# Altium PCB BBB_Board.PcbDoc (part 2 of 3)
Units mil, origin at the board's own origin, x right, y up, seen from the top; angles counter-clockwise.
Board outline 11000 x 5000 mil, 2 copper layers (Top Layer, Bottom Layer); 90 components, 379 nets, 1020 pads, 470 vias.
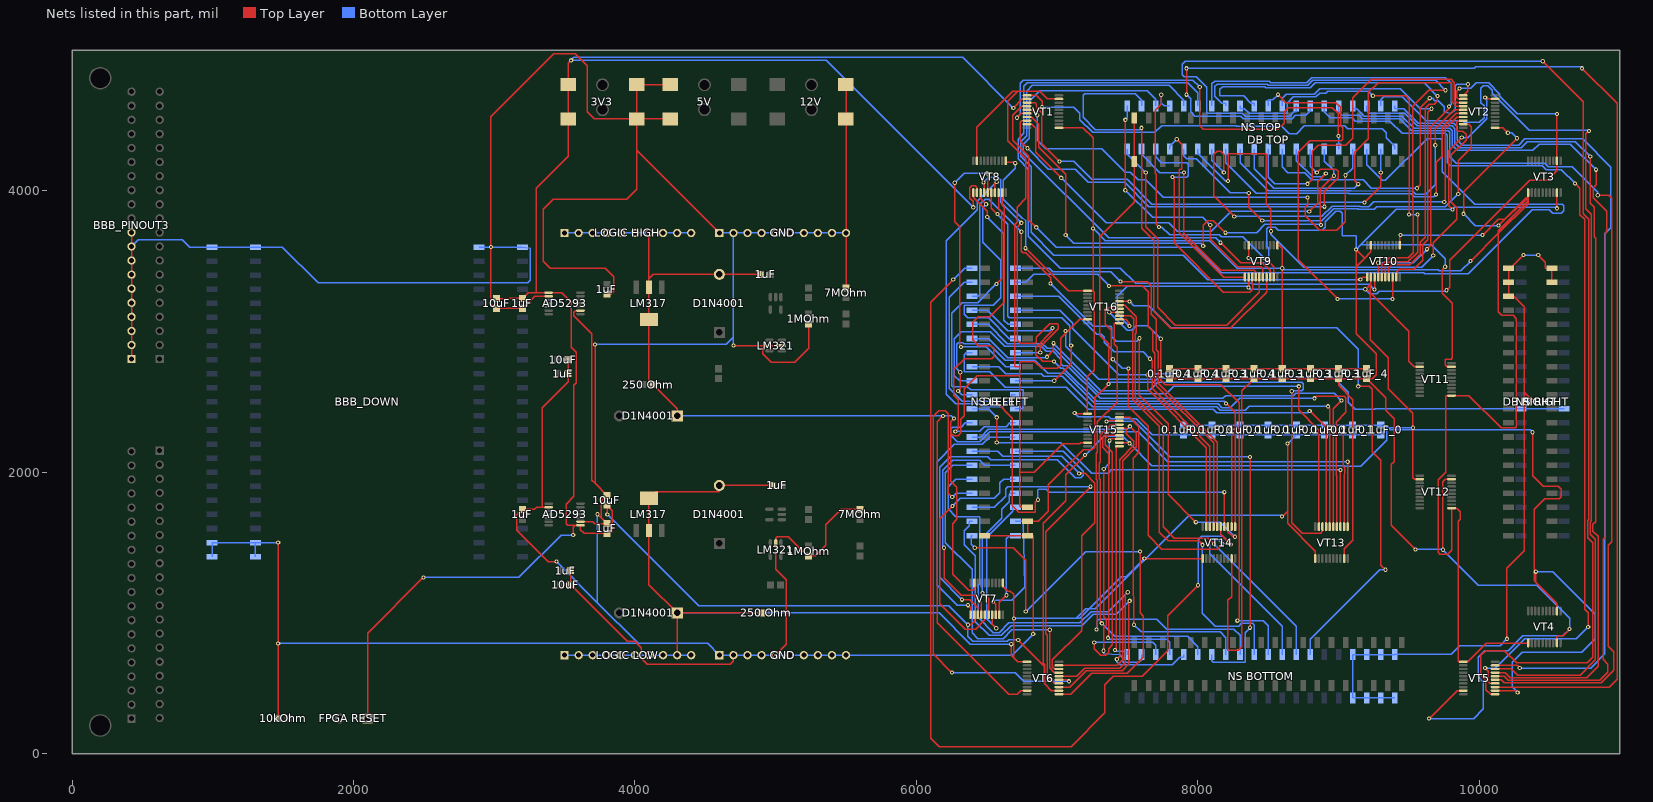
[diagram p2: the nets of this part, all layers, seen from the top]

## Via types
v1: diameter 30, hole 15, Top Layer to Bottom Layer, 470 vias

## Nets (pads, with @x,y where several pads share a name; then routed paths per layer and width w, separated by ;. In a path a pad name is that pad's centre, name@x,y a point inside that pad or via, vN(x,y) a via of type N, cw(c..) or ccw(c..) an arc to the next point about the centre after c; other vN are vias at no path point) (continued)
GLOBAL_3V3: 0.1uF_0.1 0.1uF_1.1 1uF.2@3200,3235 1uF.2@3800,1565 3V3.2 3V3.3 10uF.2@3017,3234 10uF.2@3801,1766 "FPGA RESET.1" AD5293.8 VT1.2 VT2.2 VT3.2 VT4.2 VT5.2 VT6.2 VT7.2 VT8.2 VT9.2 VT10.2 VT11.2 VT12.2 VT13.2 VT14.2 VT15.2 VT16.2 | length 37752.2
  Top Layer w10: 2100,250 2100,855 v1(2497,1252) ; 10uF.2@3017,3234 3108,3234 3109,3235 1uF.2@3200,3235 3241.77,3276.77 AD5293.8@3386.81,3276.77 3480,3276.77 3549,3207.77 3549,2887.39 3584,2852.39 3584,2637 3566,2619 3566,1827.32 3512,1773.32 3512,1632.43 3521.2,1623.23 3575.23,1623.23 ; 3300,3276.77 3300,4019 3527,4246 3V3.3@3527,4510 3V3.2@3527,4755 3527,4907 v1(3547,4927) ; v1(3561,1553) 3561,1609 3575.23,1623.23 ; 10uF.2@3801,1766 10uF.2@3804,1763 ; v1(3804,1700) 10uF.2@3804,1763 ; v1(6366,916) 6388,916 6410.43,938.43 VT7.2@6410.43,986.81 ; v1(6404,3882) 6404,3925.25 6380.98,3948.27 6380.98,4020 6394.98,4034 6420,4034 6430.43,4023.57 VT8.2@6430.43,3986.81 ; v1(6688.93,4588) 6753,4652.07 VT1.2@6786.81,4652.07 ; v1(6724,807) 6910,621 6910,497.93 6911,496.93 ; VT6.2@7013.19,447.93 6960,447.93 6911,496.93 ; v1(7199,2122) 7060,1983 7060,1798 6900,1638 6900,644 6911,633 6911,496.93 ; VT15.2@7443.19,2210.43 7509.57,2210.43 v1(7515,2205) ; VT16.2@7443.19,3085.43 7488.57,3085.43 7514,3060 v1(7514,3038) ; v1(8231,2305) 8239.57,2296.43 VT14.2@8239.57,1613.19 ; v1(8360.43,3312) VT9.2@8360.43,3386.81 ; v1(9034,2314) 9034,2042.16 9045,2031.16 9045,1991.43 9039.57,1986 VT13.2@9039.57,1613.19 ; v1(9190,3300) v1@9195.3,3305.3 ; VT10.2@9230.43,3386.81 9230.43,3340.43 ; VT12.2@9576.81,1949.57 9540,1949.57 9529,1960.57 v1(9529,2316) 9529,2417.16 9353,2593.16 9353,2813.25 9225,2941.25 9225,3275.6 ; VT11.2@9576.81,2749.57 9539.43,2749.57 9499.8,2789.2 9499.8,3000.81 9225,3275.6 ; v1(9768,3293) 9789,3314 9789,3506 10358.69,4075.69 10484.4,4075.69 10552.07,4143.35 VT3.2@10552.07,4213.19 v1(10552.07,4546) ; v1(9859,4727) 9840,4708 9840,4662.07 9850,4652.07 VT2.2@9886.81,4652.07 ; VT5.2@10113.19,447.93 10260.07,447.93 v1(10273,435) ; v1(10379,2284) 10379,1974.8 10453.8,1900 10563,1900 10583,1880 10583,1827 10569,1813 10465,1813 10390,1738 10390,1231.07 10402,1219.07 ; v1(10402,1293) 10402,1219.07 ; VT4.2@10552.07,1013.19 10552.07,1069 10402,1219.07 ; 3575.23,1623.23 AD5293.8@3613.19,1623.23 3613.19,1591.81 3640,1565 1uF.2@3800,1565 3840,1575 3840,1727 10uF.2@3804,1763 ; v1@9195.3,3305.3 9225,3275.6 ; v1@9195.3,3305.3 9230.43,3340.43 ; 9225,3275.6 9225,3321.57 9230.43,3327 9230.43,3340.43
  Bottom Layer w10: v1(2497,1252) 3176,1252 3477,1553 v1(3561,1553) ; v1(3804,1700) 4452,1052 6230,1052 v1(6366,916) 6366,832.5 6401.5,797 6644.5,797 6656.5,809 6722,809 v1(6724,807) ; v1(6404,3882) 5359,4927 v1(3547,4927) 3567,4947 6329.93,4947 v1(6688.93,4588) ; v1(7199,2122) 7332,2255 7465,2255 v1(7515,2205) 7674,2046 9042,2046 9045,2043 9158,2043 9341,2226 9341,2324 ; v1(7514,3038) 7426.66,3125.34 7426.66,3248.66 7498,3320 8352.43,3320 v1(8360.43,3312) 8372.43,3300 v1(9190,3300) 9223,3267 9269.99,3267 9287.99,3285 9760,3285 v1(9768,3293) ; 0.1uF_0.1@7900,2335 0.1uF_0.1@8100,2335 0.1uF_0.1@8300,2335 ; v1(8231,2305) 8270,2305 0.1uF_0.1@8300,2335 ; v1(9034,2314) 9055,2335 ; v1(9529,2316) 9365,2316 ; v1(9859,4727) 9940,4727 9979,4766 10066.46,4766 10145,4687.46 10145,4670 10269,4546 v1(10552.07,4546) ; v1(10273,435) 10233,475 10233,649.62 10304.38,721 10728,721 10825,818 10825,989 10521,1293 v1(10402,1293) ; v1(10379,2284) 10363,2300 9365,2300 9365,2316 ; 0.1uF_0.1@8300,2335 0.1uF_0.1@8500,2335 0.1uF_0.1@8700,2335 0.1uF_0.1@8900,2335 9055,2335 ; 9055,2335 0.1uF_1.1@9100,2335 0.1uF_0.1@9300,2335 9330,2335 ; 9330,2335 9341,2324 ; 9330,2335 9365,2316 ; 9341,2324 9349,2316 9365,2316
GLOBAL_HIGH_POWER: 0.1uF_3.1 0.1uF_4.1 1uF.2@4893,3406 "250 Ohm.2"@4129,2622 "DB LEFT.23" "LOGIC HIGH.1" "LOGIC HIGH.2" "LOGIC HIGH.3" "LOGIC HIGH.4" "LOGIC HIGH.5" "LOGIC HIGH.6" "LOGIC HIGH.7" "LOGIC HIGH.8" "LOGIC HIGH.9" "LOGIC HIGH.10" D1N4001.1@4600,3405.91 D1N4001.2@4300.91,2400 LM317.2@4100,3314.17 LM317.4@4100,3085.83 VT1.19 VT2.19 VT3.19 VT4.19 VT5.19 VT6.19 VT7.19 VT8.19 VT9.19 VT10.19 VT11.19 VT12.19 VT13.19 VT14.19 VT15.19 VT16.19 | length 34069
  Top Layer w10: 4100,3700 4100,3375 ; D1N4001.2@4300.91,2400 4300.91,2450.09 4129,2622 4100,2651 LM317.4@4100,3085.83 LM317.2@4100,3314.17 4100,3375 ; 1uF.2@4893,3406 4746.09,3406 4746,3405.91 D1N4001.1@4600,3405.91 4130.91,3405.91 4100,3375 ; v1(6189,2400) 6149,2360 6149,931 6656.5,423.5 6716.5,423.5 6740.93,447.93 VT6.19@6786.81,447.93 ; v1(6267,2381) 6246,2360 6246,2277 ; VT7.19@6410.43,1213.19 6410.43,1171.43 6399,1160 6371.66,1160 6258,1273.66 6258,1634.03 6288,1664.03 6288,1892 6246,1934 6246,2277 ; VT8.19@6430.43,4213.19 6430.43,4452.43 6685,4707 6720,4707 ; VT1.19@7013.19,4652.07 6930,4652.07 6875.07,4707 6720,4707 ; v1(7060,3003) 7077,3003 ; VT15.19@7216.81,2210.43 7169.91,2210.43 7161.69,2202.22 7039.78,2202.22 6837.56,2000 6735,2000 ; VT16.19@7216.81,3085.43 7159.43,3085.43 7077,3003 ; 0.1uF_4.1@7800,2665 7830,2665 ; v1(7865,2700) 7830,2665 ; VT14.19@8239.57,1386.81 8239.57,1114.57 8214,1089 8214,737 8216,735 8287,735 8313,761 8313,2578 0.1uF_4.1@8400,2665 ; v1(8360.43,3521.57) VT9.19@8360.43,3613.19 ; VT13.19@9039.57,1386.81 9039.57,1455 9100,1515.43 9100,2516.35 9000,2616.35 0.1uF_3.1@9000,2665 ; VT10.19@9230.43,3613.19 9230.43,3567 9185.22,3521.78 ; v1(9547,1451) 9375,1623 9375,2056 9395,2076 9395,2380 9335,2440 9335,2530 0.1uF_4.1@9200,2665 ; v1(9643,249) 9841.93,447.93 VT5.19@9886.81,447.93 ; v1@9740,1451 v1(9742,1449) 9742,1931.57 9760,1949.57 VT12.19@9803.19,1949.57 ; v1(9758,3460) 9737,3439 9737,3272.89 9809,3200.89 9809,2810 9800,2801 9758.69,2801 9756.69,2799 9756.69,2763.87 9771,2749.57 VT11.19@9803.19,2749.57 ; v1(9809,3867.36) 9781.68,3894.68 9781.68,4283.68 v1(9876,4378) ; v1(10042,4662) 10051.93,4652.07 VT2.19@10113.19,4652.07 ; VT4.19@10552.07,786.81 10552.07,829.18 10561.69,838.8 10595.8,838.8 v1(10642,885) ; v1(10552.07,3875) VT3.19@10552.07,3986.81 ; 6246,2277 6264,2259 6296,2259 6316,2279 6316,2376 6341,2401 6341,2594 6433,2686 6735,2686 ; 6720,4707 6649,4636 6649,4355 6777,4227 6777,3945 6716,3884 6716,3775.46 6698,3757.46 6698,2750 6735,2750 ; 6735,1761 6735,1980 ; 6735,1761 6791.04,1750 6746,1750 6735,1761 ; 6735,1980 6735,2000 ; 6735,1980 6734,2000 6735,2000 ; 6735,2000 6735,2686 ; 6735,2686 6735,2750 ; 6735,2750 6735,2784 6737,2786 6841.43,2786 6890.43,2737 7002,2737 7026,2761 7026,2952 7077,3003 ; 7830,2665 0.1uF_4.1@8000,2665 0.1uF_3.1@8200,2665 0.1uF_4.1@8400,2665 ; 0.1uF_4.1@8400,2665 0.1uF_3.1@8600,2665 0.1uF_3.1@8800,2665 0.1uF_3.1@9000,2665 ; 0.1uF_3.1@9000,2665 0.1uF_4.1@9200,2665 ; 9125,3461.57 9185.22,3521.78 ; 9125,3461.57 9125,2984 9269,2840 9269,2694 9240,2665 0.1uF_4.1@9200,2665 ; 9125,3461.57 v1(9125,3582) 9185.22,3521.78
  Bottom Layer w10: 3500,3700 3600,3700 3700,3700 3800,3700 3900,3700 4000,3700 4100,3700 4200,3700 4300,3700 4400,3700 ; D1N4001.2@4300.91,2400 v1(6189,2400) 6248,2400 v1(6267,2381) ; v1(7060,3003) 7060,2895 7295,2660 7664.09,2660 7704.09,2700 v1(7865,2700) ; v1(8360.43,3521.57) 8395,3487 8492,3487 8505,3500 8505,3590 8489,3606 8489,3731 8500,3742 8550,3742 8572,3720 8886,3720 8906,3740 8906,3781 8979,3854 9012,3854 9026,3840 9026,3681 9125,3681 v1(9125,3582) 9158,3615 ; v1(9547,1451) v1@9740,1451 ; v1(9643,249) 9960,249 10029,318 10029,509 9993,545 9993,684 10040,731 10204.95,731 10309.95,836 10593,836 v1(10642,885) 10642,962.48 10407.1,1197.37 9993.63,1197.37 v1(9742,1449) ; v1(9758,3460) 9758,3517 9660,3615 9158,3615 ; v1(9876,4378) 9918,4378 10053,4513 10053,4651 v1(10042,4662) ; v1(10552.07,3875) 10544.07,3883 9818.91,3883 9818.91,3877.27 v1(9809,3867.36) 9410.36,3867.36 9158,3615
GLOBAL_LOW_POWER: 0.1uF_0.2 0.1uF_1.2 0.1uF_3.2 0.1uF_4.2 1uF.2@4976,1906 "250 Ohm.2"@4898,1000 "LOGIC LOW.1" "LOGIC LOW.2" "LOGIC LOW.3" "LOGIC LOW.4" "LOGIC LOW.5" "LOGIC LOW.6" "LOGIC LOW.7" "LOGIC LOW.8" "LOGIC LOW.9" "LOGIC LOW.10" D1N4001.1@4600,1905.91 D1N4001.2@4300.91,1000 LM317.2@4100,1585.83 LM317.4@4100,1814.17 VT1.11 VT2.11 VT3.11 VT4.11 VT5.11 VT6.11 VT7.11 VT8.11 VT9.11 VT10.11 VT11.11 VT12.11 VT13.11 VT14.11 VT15.11 VT16.11 | length 31179.9
  Top Layer w10: 4300,700 4300,849 4300.91,849.91 D1N4001.2@4300.91,1000 ; 4898,1000 D1N4001.2@4300.91,1000 ; 1uF.2@4976,1906 4787.09,1906 4787,1905.91 D1N4001.1@4600,1905.91 4600,1861 4146.83,1861 LM317.4@4100,1814.17 LM317.2@4100,1585.83 4100,1200.91 D1N4001.2@4300.91,1000 ; VT7.11@6615.16,1213.19 6615.16,1191 6650.72,1155.43 6668.78,1155.43 6693,1131.21 v1(6693,961) 6693,778 6693,679.66 ; VT8.11@6635.16,4213.19 6635.16,4203 6696,4203 v1(6703,4196) ; v1(6674,778) 6674,698.66 6693,679.66 ; v1(6776,3592) 7077.84,3290.16 VT16.11@7216.81,3290.16 7253.84,3290.16 ; VT6.11@6786.81,652.66 6720,652.66 6693,679.66 ; VT1.11@7013.19,4447.34 7184,4447.34 7256,4375.34 v1(7256,3732) 7256,3292.32 7253.84,3290.16 ; v1(7125,2420) 7129.84,2415.16 VT15.11@7216,2415.16 ; VT15.11@7216.81,2415.16 VT15.11@7216,2415.16 ; v1(7620,1386) 8034.84,1386 VT14.11@8034.84,1386.81 ; 0.1uF_4.2@7800,2735 0.1uF_4.2@8000,2735 0.1uF_3.2@8200,2735 0.1uF_4.2@8400,2735 0.1uF_3.2@8600,2735 ; VT9.11@8565.16,3613.19 8580,3613.19 8600,3593.19 v1(8600,3449) 0.1uF_3.2@8600,2735 ; v1(8599,1685) 8638,1724 ; v1(8638,2203) 8638,1724 ; VT13.11@8834.84,1386.81 8834.84,1440 8638,1636.84 8638,1724 ; 0.1uF_4.2@9200,2735 0.1uF_3.2@9000,2735 0.1uF_3.2@8800,2735 0.1uF_3.2@8600,2735 ; VT10.11@9435.16,3613.19 9435.16,3680.16 v1(9440,3685) ; v1(9889,3836) 9889,3993 v1(10269,4373) ; v1(9938,3500) 10136,3698 ; v1(10024,3685) 10136,3797 10180,3797 ; VT2.11@10113.19,4447.34 10168,4447.34 v1(10203.34,4412) ; v1(10136,3753) 10180,3797 ; VT4.11@10347.34,786.81 10347.34,784 10051.34,784 9920,652.66 VT5.11@9886.81,652.66 9850,652.66 9850,1651.98 9865,1666.98 9865,1719.84 9840,1744.84 VT12.11@9803.19,1744.84 9803,1744.84 9803,1444.47 9776.53,1418 9720,1418 9708,1430 9708,1945 9763,2000 9763,2544.84 VT11.11@9803.19,2544.84 9926.14,2544.84 10155.98,2315 10264,2315 10264,3091 10241,3114 10161,3114 10136,3139 10136,3698 ; VT3.11@10347.34,3986.81 10347.34,3950 ; VT15.11@7216,2415.16 7216,2678 7264,2726 7264,3280 7253.84,3290.16 ; 10136,3698 10136,3717 10347.34,3928.34 ; 10136,3698 10347.34,3909.34 10347.34,3928.34 ; 10180,3797 10333,3950 10347.34,3950 ; 10180,3797 10347.34,3950 ; 10347.34,3928.34 10347.34,3950
  Bottom Layer w10: 3500,700 3600,700 3700,700 3800,700 3900,700 4000,700 4100,700 4200,700 4300,700 4400,700 ; D1N4001.2@4300.91,1000 6162.65,1000 6384.65,778 v1(6674,778) ; v1(6693,961) 7136.26,961 ; v1(6703,4196) 6703,4160 6619,4076 6619,3941 6754,3806 6776,3790 v1(6776,3592) ; v1(7125,2420) 7152,2393 7368,2393 7382,2379 7562,2379 7676,2265 0.1uF_0.2@7900,2265 0.1uF_0.2@8100,2265 0.1uF_0.2@8300,2265 0.1uF_0.2@8500,2265 0.1uF_0.2@8700,2265 ; v1(7256,3732) 7342,3646 8084,3646 8281,3449 v1(8600,3449) 8612,3437 9709,3437 9716,3430 9868,3430 v1(9938,3500) ; v1(7620,1386) 7491,1257 7456,1257 7227,1028 ; v1(8599,1685) 8590,1694 7938,1694 7272,1028 7227,1028 ; v1(8638,2203) 0.1uF_0.2@8700,2265 ; 0.1uF_0.2@9300,2265 0.1uF_1.2@9100,2265 0.1uF_0.2@8900,2265 0.1uF_0.2@8700,2265 ; v1(9440,3685) v1(10024,3685) ; v1(9889,3836) 9972,3753 v1(10136,3753) ; v1(10203.34,4412) 10230,4412 v1(10269,4373) ; 7136.26,961 7160,961 7227,1028 ; 7136.26,961 7203.26,1028 7227,1028
GND: 1MOhm.1 1uF.1@3200,1735 1uF.1@3200,3165 1uF.1@3525,2700 1uF.1@3543,1300 1uF.1@3800,1635 1uF.1@3800,3265 3V3.1 5V.2 5V.3 7MOhm.1 10kOhm.1 10uF.1 12V.1 "DB LEFT.20" "DB LEFT.21" "DB LEFT.22" "DB RIGHT.19" "DB RIGHT.20" "DB RIGHT.21" "DB RIGHT.22" "DB RIGHT.23" "DB TOP.20" "DB TOP.21" "NS BOTTOM.17" "NS BOTTOM.18" "NS BOTTOM.19" "NS BOTTOM.20" "NS BOTTOM.21" "NS BOTTOM.22" "NS BOTTOM.23" "NS BOTTOM.24" "NS RIGHT.11" "NS RIGHT.30" AD5293.2 AD5293.9 BBB_DOWN.1 BBB_DOWN.2 BBB_DOWN.43 BBB_DOWN.44 BBB_DOWN.45 BBB_DOWN.46 BBB_DOWN.47 BBB_DOWN.48 BBB_PINOUT3.1 BBB_PINOUT3.2 BBB_PINOUT3.3 BBB_PINOUT3.4 BBB_PINOUT3.5 BBB_PINOUT3.6 BBB_PINOUT3.7 BBB_PINOUT3.8 BBB_PINOUT3.9 BBB_PINOUT3.10 GND.1 GND.2 GND.3 GND.4 GND.5 GND.6 GND.7 GND.8 GND.9 GND.10 LM321.2@5000,1494.29 LM321.2@5044.29,2900 | length 46862
  Top Layer w10: BBB_PINOUT3.1@423,2804 BBB_PINOUT3.2@423,2904 BBB_PINOUT3.3@423,3004 BBB_PINOUT3.4@423,3104 BBB_PINOUT3.5@423,3204 BBB_PINOUT3.6@423,3304 BBB_PINOUT3.7@423,3404 BBB_PINOUT3.8@423,3504 BBB_PINOUT3.9@423,3604 BBB_PINOUT3.10@423,3704 ; 10kOhm.1@1465,250 v1(1465,783) v1(1465,1500) ; AD5293.2@3386.81,1751.18 3341,1751.18 ; AD5293.9@3386.81,3251.18 3288.58,3251.18 3233.2,3195.81 3230.81,3195.81 1uF.1@3200,3165 3109,3165 3108,3164 10uF.1@3017,3164 2977,3194 v1(2977,3600) 2977,4527 3422,4972 3577,4972 3662,4887 3662,4560 3712,4510 3V3.1@4012,4510 ; v1(3443,1365) 3383,1365 3159,1589 3159,1698 3170,1709 3174,1709 1uF.1@3200,1735 3285,1735 3301.18,1751.18 3341,1751.18 ; 10uF.1@3525,2800 1uF.1@3525,2700 3525,2642.36 3341,2458.36 3341,1751.18 ; 1uF.1@3543,1300 10uF.1@3543,1200 3944,799 4000,799 4046,753 4046,679 4089,636 4679,636 4700,657 GND.2@4700,700 ; AD5293.9@3613.19,1648.82 3699,1648.82 3712.82,1635 1uF.1@3800,1635 3760,1675 ; AD5293.2@3613.19,3148.82 3580,3148.82 3567,3135.82 3567,3112 3695,2984 3695,1942 3717,1920 ; v1(3717,2908) 3717,1920 ; v1(3734,1701) 3760,1675 ; 1uF.1@3800,3265 3828,3265 3850,3287 3850,3390 3790,3450 3400,3450 3350,3500 3350,3870 3420,3940 3942,3940 4012,4010 4012,4288 ; 5V.3@4252,4510 3V3.1@4012,4510 ; 5V.2@4252,4755 3V3.1@4012,4755 3V3.1@4012,4510 ; GND.1@4600,3700 4012,4288 ; v1(4700,2900) 4930,2900 ; GND.5@5000,700 5076,776 5076,1235 5000,1311 LM321.2@5000,1494.29 5000,1530 5010,1540 5090,1540 5195,1435 5205,1435 1MOhm.1@5235,1405 5282,1405 5357,1480 5357,1627 5465,1735 7MOhm.1@5600,1735 ; LM321.2@5044.29,2900 4930,2900 ; 1MOhm.1@5235,3054 5235,2880 5135,2780 4970,2780 4909,2841 4909,2879 4930,2900 ; 7MOhm.1@5500,3310 GND.10@5500,3700 12V.1@5500,4770 ; 6483.96,1550 6791.04,1550 ; v1(6830,850) 6830,1550 6791.04,1550 ; 7550,4516.04 7550,4208.96 7550,3920 7304,3674 7304,2974.67 7366,2912.67 v1(7366,2626) 7268,2528 7268,2179 7247,2158 7186,2158 6939,1911 6939,1724 6865,1650 6791.04,1650 6791.04,1550 ; v1(10197,816) 10197,1317 10321,1441 10321,2568 ; v1(10314,3543) 10221,3450 10208.96,3450 10208.96,3350 10208.96,3250 10246,3250 10321,3175 10321,2568 ; v1(10375,2510) 10321,2568 ; v1(10419,3543) 10470,3492 10470,3450 10516.04,3450 10516.04,3350 ; 3717,1920 10uF.1@3801,1836 3773,1808 3770,1808 3760,1798 3760,1675 ; 4012,4288 3V3.1@4012,4510
  Bottom Layer w10: BBB_PINOUT3.9@423,3604 472,3653 782,3653 835,3600 BBB_DOWN.1@995.83,3600 BBB_DOWN.2@1302.91,3600 1495.13,3600 1748.13,3347 3237,3347 3255,3365 3255,3590 BBB_DOWN.48@3200,3600 v1(2977,3600) BBB_DOWN.47@2892.91,3600 ; BBB_DOWN.45@995.83,1400 BBB_DOWN.43@995.83,1500 BBB_DOWN.44@1302.91,1500 ; BBB_DOWN.46@1302.91,1400 BBB_DOWN.44@1302.91,1500 ; v1(1465,783) 4025,783 ; v1(1465,1500) BBB_DOWN.44@1302.91,1500 ; v1(3443,1365) 3734,1074 ; v1(3717,2908) 4648,2908 4700,2960 ; v1(3734,1701) 3734,1074 ; GND.1@4600,3700 GND.2@4700,3700 ; v1(4700,2900) 4700,2960 ; GND.10@5500,3700 GND.9@5400,3700 GND.8@5300,3700 GND.7@5200,3700 GND.6@5100,3700 GND.5@5000,3700 GND.4@4900,3700 GND.3@4800,3700 GND.2@4700,3700 ; v1(6830,850) 6680,700 GND.10@5500,700 GND.9@5400,700 GND.8@5300,700 GND.7@5200,700 GND.6@5100,700 GND.5@5000,700 GND.4@4900,700 GND.3@4800,700 GND.2@4700,700 GND.1@4600,700 4517,783 4025,783 ; v1(7366,2626) 7378.16,2638.16 7685.22,2638.16 7716.06,2669 8970,2669 9070,2569 9070,2498 9120,2448 9259,2448 9261,2450 10296.46,2450 10319,2450 ; 9400,396.46 9300,396.46 9200,396.46 9100,396.46 9100,703.54 9200,703.54 9300,703.54 9400,703.54 9400,707 9800,707 9861,768 10149,768 v1(10197,816) ; v1(10314,3543) v1(10419,3543) ; v1(10375,2510) 10340,2510 10319,2489 10319,2450 ; 10603.54,2450 10319,2450 ; 3734,1074 4025,783 ; 4700,2960 GND.2@4700,3700
IVL_B0: "NS TOP.1" VT1.1 | length 2942.5
  Top Layer w10: VT1.1@6786.81,4677.66 6851.34,4677.66 6893,4636 v1(6893,4594)
  Bottom Layer w10: v1(6893,4594) 7120,4594 7162,4552 7162,4505 7253,4414 7695,4414 7743,4462 8272.49,4462 8275.49,4459 8597,4459 8650,4406 8702,4406 8758,4462 9044.53,4462 9065.53,4441 9312,4441 9340,4413 9340,4376 9400,4316 9400,4296.46
IVL_B1: "NS TOP.2" VT1.3 | length 3273.6
  Top Layer w10: VT1.3@6786.81,4626.48 6849.52,4626.48 6857.64,4586 6890,4553.64 6890,4335 v1(7017,4208) ; v1(9185,3917) 9300,4032 v1(9300,4130)
  Bottom Layer w10: v1(7017,4208) 7117,4208 7245,4080 7497.51,4080 7672.51,3905 8858,3905 8870,3917 v1(9185,3917) ; v1(9300,4130) 9300,4296.46
IVL_B2: "NS TOP.3" VT1.4 | length 7133.1
  Top Layer w10: VT1.4@6786.81,4600.89 6749.82,4600.89 6685,4536.07 6685,4360.15 6800,4245.15 6800,3792 v1(6852,3740)
  Bottom Layer w10: v1(6852,3740) 6994.03,3597.97 7988.03,3597.97 8168,3418 9606.65,3418 9613.65,3411 9922.18,3411 10376.11,3864.93 10497.07,3864.93 10523,3839 10582,3839 10601.5,3858.5 10601.5,3893.5 10590,3905 9967,3905 9736,4136 9736,4360 9725,4371 9630,4371 9333,4074 9310,4074 9200,4184 9200,4296.46
IVL_B3: "NS TOP.4" VT1.5 | length 3384.2
  Top Layer w10: VT1.5@6786.81,4575.3 6820.7,4575.3 v1(6859,4537) ; v1(8780,3953) 8780,3901 8762,3883 8762,3823 8865,3720 8989,3720 9049,3780 v1(9049,4110)
  Bottom Layer w10: v1(6859,4537) 6859,4360 6920,4299 7318,4299 7485,4132 7521.13,4132 7575.13,4078 7629.54,4078 7754.54,3953 v1(8780,3953) ; v1(9049,4110) 9100,4161 9100,4296.46
IVL_B4: "NS TOP.5" VT1.6 | length 3299.1
  Top Layer w10: v1(6715,4519) 6745.7,4549.7 VT1.6@6786.81,4549.7 ; v1(8014,4738.21) 8014,4461 8039,4436 8569,4436 8613,4480 8613,4562 8641,4590 8957,4590 8997,4550 8997,4391.31 v1(9000,4388.31)
  Bottom Layer w10: v1(6715,4519) 6738,4542 6738,4765 6760,4787 7965.21,4787 v1(8014,4738.21) ; 9000,4296.46 v1(9000,4388.31)
IVL_B5: "NS TOP.6" VT1.7 | length 3652
  Top Layer w10: VT1.7@6786.81,4524.11 6818.89,4524.11 6870,4473 6870,4307.65 7061,4116.65 v1(7061,3685) ; v1(8038,3608) 8038,3755 8071,3788 8110,3788 v1(8196,3702) ; v1(8876,3756) 8870,3762 8870,4010 v1(8967,4107)
  Bottom Layer w10: v1(7061,3685) 7120,3626 8020,3626 v1(8038,3608) ; v1(8196,3702) 8418,3702 8477,3761 8871,3761 v1(8876,3756) ; 8900,4296.46 8900,4211 8967,4144 v1(8967,4107)
IVL_B6: "NS TOP.7" VT1.8 | length 3183.5
  Top Layer w10: VT1.8@6786.81,4498.52 6750,4498.52 6740,4488.52 6740,4352 v1(6790,4302) ; v1(8846,4129) 8869,4152 8982,4152 8997,4137 8997,4091.17 8900,3994.17 v1(8900,3887)
  Bottom Layer w10: v1(6790,4302) 6937.89,4154.11 7127.89,4154.11 7222,4060 7480.09,4060 7653.09,3887 v1(8900,3887) ; 8800,4296.46 8800,4175 v1(8846,4129)
IVL_B7: "NS TOP.8" VT1.9 | length 3147.1
  Top Layer w10: VT1.9@6786.81,4472.93 6820.38,4472.93 6849.89,4443.42 6849.89,4272.11 v1(7030,4092) ; v1(8792,3853) 8851,3912 8851,4063 v1(8910,4122)
  Bottom Layer w10: v1(7030,4092) 7350,3772 7795,3772 7855,3712 8096.73,3712 8237.73,3853 v1(8792,3853) ; 8700,4296.46 8700,4214.58 8816.58,4098 8886,4098 v1(8910,4122)
IVL_B8: "NS TOP.9" VT2.1 | length 2441.4
  Top Layer w10: v1(9558,4018) 9581,4041 9581,4591 v1(9648,4658) ; VT2.1@9886.81,4677.66 9889.09,4677.66 9920,4708.57 v1(9920,4757)
  Bottom Layer w10: 8600,4296.46 8600,4169 8640,4129 8759,4129 8811,4077 9175,4077 9234,4018 v1(9558,4018) ; v1(9648,4658) 9668,4658 9685,4641 9707.53,4641 9750,4598.53 9750,4559 9800,4549 9828,4577 9828,4745 9840,4757 v1(9920,4757)
IVL_B9: "NS TOP.10" VT2.3 | length 2338.1
  Top Layer w10: v1(8780,4049) 8814,4083 8814,4279 8857,4322 9050,4322 9101,4373 9101,4661 9231,4791 9800,4791 9822,4769 9822,4644.48 9840,4626.48 VT2.3@9886.81,4626.48
  Bottom Layer w10: 8500,4296.46 8500,4097 8548,4049 v1(8780,4049)
IVL_B10: "NS TOP.11" VT2.4 | length 2496.7
  Top Layer w10: v1(9140,4047) 9115,4072 9115,4273 9213,4371 9213,4699.32 9281.68,4768 9796,4768 9803,4761 9803,4635.07 9837.18,4600.89 VT2.4@9886.81,4600.89
  Bottom Layer w10: 8400,4296.46 8400,4157 8538,4019 9112,4019 v1(9140,4047)
IVL_B11: "NS TOP.12" VT2.5 | length 2256.6
  Top Layer w10: v1(9688,4323) 9688,4440.98 9822.31,4575.3 VT2.5@9886.81,4575.3
  Bottom Layer w10: 8300,4296.46 8300,4200 8499,4001 9090,4001 9527,3997 9549,3975 9620,3975 9688,4043 v1(9688,4323)
IVL_B12: "NS TOP.13" VT2.6 | length 2382.8
  Top Layer w10: v1(9693,3973) 9693,4201.5 9738,4246.5 9738,4450.53 9837.18,4549.7 VT2.6@9886.81,4549.7
  Bottom Layer w10: 8200,4296.46 8200,4200 8417,3983 9072,3983 9076.68,3978.32 9516.68,3978.32 9538,3957 9677,3957 v1(9693,3973)
IVL_B13: "NS TOP.14" VT2.7 | length 3147.7
  Top Layer w10: v1(8185,4130) 8185,4260 8163,4282 8137,4282 8114,4259 8114,3963 v1(8259,3818) ; v1(9751,3921) 9759,3929 9759,4444 9839.11,4524.11 VT2.7@9886.81,4524.11
  Bottom Layer w10: 8100,4296.46 8100,4215 v1(8185,4130) ; v1(8259,3818) 8881,3818 8954,3891 9151,3891 9155,3887 9215,3887 9249,3921 v1(9751,3921)
IVL_B14: "NS TOP.15" VT2.8 | length 3836.7
  Top Layer w10: v1(8215,4069) 8215,4264 8485,4264 8485,3905 8520,3870 v1(8520,3712) ; v1(9673,3539) 9673,3630 9839,3796 9839,3880 9802,3917 9802,4255 9906,4359 9906,4400 9884,4422 9851,4422 9840,4433 9840,4488.52 9850,4498.52 VT2.8@9886.81,4498.52
  Bottom Layer w10: 8000,4296.46 8000,4267.32 8198.32,4069 v1(8215,4069) ; v1(8520,3712) 8520,3690 8752,3458 9592,3458 v1(9673,3539)
IVL_B15: "NS TOP.16" VT2.9 | length 2911.1
  Top Layer w10: v1(8362,3985) 8362,3884 v1(8458,3788) ; v1(9851,3977.32) 9851,4214.18 9943,4306.18 9943,4454 9924.07,4472.93 VT2.9@9886.81,4472.93
  Bottom Layer w10: 7900,4296.46 7900,4247 7920,4227 7988.95,4227 8230.95,3985 v1(8362,3985) ; v1(8458,3788) 8880,3788 8965,3873 9136,3873 9141,3868 9253,3868 9271,3886 9759.68,3886 v1(9851,3977.32)
IVL_B16: "NS TOP.17" VT9.1 | length 1380.1
  Top Layer w10: v1(7850,4366) 7886,4330 7886,4155.58 7885,4154.58 7871,4154.58 7869,4152.58 7869,3703.32 8185.32,3387 8334.84,3387 VT9.1@8334.84,3386.81
  Bottom Layer w10: 7800,4296.46 7800,4316 v1(7850,4366)
IVL_B17: "NS TOP.18" VT9.3 | length 1781.1
  Top Layer w10: v1(7820,4097) 7831,4086 7831,3628.97 8181.97,3278 8369,3278 8391,3300 8391,3335.02 8386.02,3340 VT9.3@8386.02,3386.81
  Bottom Layer w10: 7700,4296.46 7700,4240 7742,4198 7922,4198 7931,4189 7931,4108 7920,4097 v1(7820,4097)
IVL_B18: "NS TOP.19" VT9.4 | length 1484.2
  Top Layer w10: v1(7901,4129) 7901,3697 8164,3434 8400,3434 8411.61,3422.39 VT9.4@8411.61,3386.81
  Bottom Layer w10: 7600,4296.46 7600,4259 7730,4129 v1(7901,4129)
IVL_B19: "NS TOP.20" VT9.5 | length 2193.3
  Top Layer w10: v1(7630,4129) 7630,3743.76 7714,3659.76 7714,3173 7841,3046 8206,3046 8437.2,3277.2 VT9.5@8437.2,3386.81
  Bottom Layer w10: 7500,4296.46 7500,4259 v1(7630,4129)
IVL_B20: "NS TOP.21" VT9.6 | length 1932.2
  Top Layer w10: v1(7485,4003.61) v1(7485,4504) ; v1(8088.33,3756) 8088.33,3656.67 8283.43,3461.57 8447.04,3461.57 8462.8,3445.81 VT9.6@8462.8,3386.81
  Bottom Layer w10: v1(7485,4003.61) 7678.61,3810 8034.33,3810 v1(8088.33,3756) ; v1(7485,4504) 7500,4519 7500,4603.54
IVL_B21: "NS TOP.22" VT9.7 | length 3495.8
  Top Layer w10: v1(7600,4447) 7600,3735 7688,3647 7688,3142.1 7806.17,3023.93 8232.31,3023.93 8488.39,3280 VT9.7@8488.39,3386.81
  Bottom Layer w10: v1(7600,4447) 7588,4435 7271.72,4435 7185,4521.72 7185,4679 7196,4690 7554,4690 7600,4644 7600,4603.54
IVL_B22: "NS TOP.23" VT9.8 | length 3532.6
  Top Layer w10: v1(8162,3631) 8304,3489 8459,3489 8513.98,3434.02 VT9.8@8513.98,3386.81
  Bottom Layer w10: 7700,4603.54 7700,4652 7640,4712 6878,4712 6801,4635 6801,4373 6760,4332 6760,4271.76 7366.76,3665 8128,3665 v1(8162,3631)
IVL_B23: "NS TOP.24" VT9.9 | length 2099.5
  Top Layer w10: v1(7725,3742) 7705,3762 7705,4117.42 7697.31,4125.1 7697.31,4573.31 7740,4616 v1(7740,4682) ; v1(8475,3518) 8480,3518 8539.57,3458.43 VT9.9@8539.57,3386.81
  Bottom Layer w10: v1(7725,3742) 7745,3742 7800,3687 8150.94,3687 8166.02,3671.92 8321.08,3671.92 v1(8475,3518) ; v1(7740,4682) 7740,4623.54 7760,4603.54 7800,4603.54
IVL_B24: "NS TOP.25" VT10.1 | length 4804
  Top Layer w10: v1(9155,3369) 9172.81,3386.81 VT10.1@9204.84,3386.81
  Bottom Layer w10: 7900,4603.54 7900,4644 7796,4748 6825,4748 6783,4706 6783,4391 6742,4350 6742,4244 6815,4171 6815,3704 6976.08,3542.92 7897.08,3542.92 8072,3368 9154,3368 v1(9155,3369)
IVL_B25: "NS TOP.26" VT10.3 | length 5184.6
  Top Layer w10: v1(9255,3298.02) 9256.02,3299.05 VT10.3@9256.02,3386.81
  Bottom Layer w10: 8000,4603.54 8000,4695.43 7929.43,4766 6786.71,4766 6763,4742.29 6763,4407 6723,4367 6723,4227 6796,4154 6796,3678 7023,3451 7449.92,3451 7558.92,3342 8382,3342 8390,3334 9219.02,3334 v1(9255,3298.02)
IVL_B26: "NS TOP.27" VT10.4 | length 3638.1
  Top Layer w10: VT10.4@9281.61,3386.81 v1(9281.61,3488.61) ; v1(9629,3585) 9655,3611 9655,4454 9786,4585 v1(9786,4599)
  Bottom Layer w10: 8100,4603.54 8100,4759 8120,4779 8508,4779 8520,4767 8773.7,4767 8809.7,4803 9760,4803 9800,4763 9800,4613 v1(9786,4599) ; v1(9281.61,3488.61) 9532.61,3488.61 v1(9629,3585)
IVL_B27: "NS TOP.28" VT10.5 | length 3549.9
  Top Layer w10: VT10.5@9307.2,3386.81 9307.2,3470.84 9360,3523.63 9494.25,3523.63 9530,3559.39 9530,3861.09 9526,3865.09 9526,4599 9641.36,4714.36 v1(9760,4714.36)
  Bottom Layer w10: 8200,4603.54 8200,4623 8169.69,4623 8120,4672.69 8120,4741 8137,4758 8493,4758 8502,4749 8781.16,4749 8817.16,4785 9689.36,4785 v1(9760,4714.36)
IVL_B28: "NS TOP.29" VT10.6 | length 2867.3
  Top Layer w10: v1(9244,4675) 9476,4675 9504,4647 9504,3835 v1(9500,3831) ; VT10.6@9332.8,3386.81 9332.8,3466.63 9360.17,3494 9492,3494 9562,3564 v1(9562,3831)
  Bottom Layer w10: 8300,4603.54 8300,4584 8329,4584 8363.83,4549.17 8634.69,4549.17 8634.69,4622.69 8679,4667 8838,4667 8865,4694 8909,4694 8922,4707 9212,4707 v1(9244,4675) ; v1(9500,3831) v1(9562,3831)
IVL_B29: "NS TOP.30" VT10.7 | length 3463.5
  Top Layer w10: VT10.7@9358.39,3386.81 9358.39,3454.22 9379.17,3475 9505.71,3475 9580.78,3550.07 9580.78,3633 9616,3668.22 9616,4585 9645,4614 9681,4614 9702.47,4635.47 v1(9702.47,4673.25)
  Bottom Layer w10: 8400,4603.54 8400,4623 8378,4623 8325.08,4675.92 8160,4675.92 8156,4679.92 8156,4720 8176,4740 8475,4740 8484,4731 8799.61,4731 8835.61,4767 9608.72,4767 v1(9702.47,4673.25)
IVL_B30: "NS TOP.31" VT10.8 | length 2904.7
  Top Layer w10: v1(8570,4683) 8626,4627 8981,4627 9015.31,4592.69 9015.31,4461.67 9031,4445.99 9031,4366 9020,4355 8795,4355 8714,4274 8714,3510 v1(8993,3231) ; v1(9383.98,3231) VT10.8@9383.98,3386.81
  Bottom Layer w10: 8500,4603.54 8500,4647 8534,4647 v1(8570,4683) ; v1(8993,3231) v1(9383.98,3231)
IVL_B31: "NS TOP.32" VT10.9 | length 2564.4
  Top Layer w10: VT10.9@9409.57,3386.81 9409.57,3420 9432.35,3442.78 9535.78,3442.78 9598.78,3505.78 9598.78,3615 9635.72,3651.95 9635.72,4557.72 v1(9661,4583)
  Bottom Layer w10: 8600,4603.54 8600,4659 8628,4687 8829.15,4687 8868.15,4726 9438,4726 9581,4583 v1(9661,4583)
IVL_B32: "NS TOP.33" VT5.1 | length 9325.3
  Top Layer w10: VT5.1@10113.19,422.34 10080,422.34 10047,455.34 10047,523 10011,559 10011,698 10045,732 10179,732 10265,646 10767,646 10806,685 10806,1499 10771,1534 10771,1656 10779,1664 10779,3797 10740,3836 10740,4631 v1(10451,4920)
  Bottom Layer w10: 8700,4603.54 8700,4566 8695.69,4561.69 8683.2,4561.69 8652.69,4531.17 8335.4,4531.17 8317.57,4549 8065,4549 8065,4734 7990.49,4808.51 7904.49,4808.51 7889,4824 7889,4899 7910,4920 v1(10451,4920)
IVL_B33: "NS TOP.34" VT5.3 | length 9400.2
  Top Layer w10: v1(7920,4683) v1(7920,4870) ; VT5.3@10113.19,473.52 10923.52,473.52 10979,529 10979,4621 v1(10730,4870)
  Bottom Layer w10: v1(7920,4683) 7950,4653 7950,4560 7980,4530 8306.17,4530 8323,4513.17 8670.69,4513.17 8693.56,4536.05 8767.05,4536.05 8800,4569 8800,4603.54 ; v1(7920,4870) 9964.26,4870 9973.7,4879.44 10720.56,4879.44 v1(10730,4870)
IVL_B34: "NS TOP.35" VT5.4 | length 6351.7
  Top Layer w10: v1(10042,608) 10065,585 10065,510 10075.89,499.11 VT5.4@10113.19,499.11 ; v1(10681,4052) 10715,4018 10715,3830 10749,3796 10749,1025 10774,1000 v1(10774,900)
  Bottom Layer w10: 8900,4603.54 8900,4560 8942,4518 9097,4518 9120,4495 9365.46,4495 9453.46,4407 9760,4407 9772,4395 9772,4202 9795,4179 10447.11,4179 10475.11,4151 10582,4151 v1(10681,4052) ; v1(10042,608) 10113,608 10322,817 10691,817 v1(10774,900)
IVL_B35: "NS TOP.36" VT5.5 | length 6622.4
  Top Layer w10: VT5.5@10113.19,524.7 10155.5,524.7 10177.2,503 10866,503 10955,592 10955,724 10917,762 10917,1481 10942,1506 10942,3672.87 10943,3673.87 10943,3945 10920,3968 v1(10842,3968)
  Bottom Layer w10: 9000,4603.54 9000,4560 9023,4537 9146.31,4537 9170.31,4513 9433.64,4513 9521.64,4425 9780,4425 9790,4415 9790,4242 9835,4197 10467.11,4197 10492.11,4172 10659.54,4172 10842,3989.54 v1(10842,3968)
IVL_B36: "NS TOP.37" VT5.6 | length 6504.7
  Top Layer w10: VT5.6@10113.19,550.3 10178,550.3 10207.3,521 10855,521 10914,580 10914,636 10881,669 10881,1525.25 10895,1539.25 10895,3697.37 10907,3709.37 10907,3855 10811,3951 10811,4022 10830,4041 v1(10830,4150)
  Bottom Layer w10: 9100,4603.54 9100,4584 9130.17,4584 9183.17,4531 9449.09,4531 9537.09,4443 9792,4443 9809,4426 9809,4323 9843,4289 10381.66,4289 10424.66,4332 10648,4332 v1(10830,4150)
IVL_B37: "NS TOP.38" VT5.7 | length 6295.9
  Top Layer w10: VT5.7@10113.19,575.89 10184.11,575.89 10221,539 10763.11,539 10844,619.89 10844,1543.5 10808,1579.5 10808,1629 10827,1648 10827,3661.42 10816.56,3671.87 10816.56,3882.44 10789,3910 v1(10789,4244.22)
  Bottom Layer w10: 9200,4603.54 9200,4567.05 9218.05,4549 9470.4,4549 9558.4,4461 9807,4461 9827,4441 9827,4341 9861,4307 10299,4307 10342,4350 10683.22,4350 v1(10789,4244.22)
IVL_B38: "NS TOP.39" VT5.8 | length 6592.1
  Top Layer w10: VT5.8@10113.19,601.48 10229,601.48 10272,558.48 10717.48,558.48 10825,666 10825,1524 10789,1560 10789,1646 10797,1654 10797,3833 10758,3872 10758,4404 v1(10779,4425)
  Bottom Layer w10: 9300,4603.54 9300,4647 9320,4667 9452,4667 9622,4497 9882,4497 9893,4486 10000,4486 10034,4520 10034,4603 10011,4626 10011,4729 10029,4747 10060,4747 10092.35,4714.65 10092.35,4691.29 10354.64,4429 10775,4429 v1(10779,4425)
IVL_B39: "NS TOP.40" VT5.9 | length 6123.7
  Top Layer w10: VT5.9@10113.19,627.07 10268.93,627.07 v1(10288,608)
  Bottom Layer w10: 9400,4603.54 9400,4584 9463,4584 9568,4479 9820,4479 9845,4454 9845,4361 9881,4325 10281,4325 10324,4368 10736,4368 10936,4168 10936,3738.87 10893,3695.87 10893,710 10791,608 v1(10288,608)
IVL_B40: "NS LEFT.1" VT6.1 | length 3327.6
  Top Layer w10: v1(6415,1463) 6690,1463 6777,1376 v1(6777,1010) ; VT6.1@7013.19,422.34 7098.34,422.34 7247,571 7498.53,571 7613,685.47 7613,977 7590,1000 v1(7590,1436)
  Bottom Layer w10: 6396.46,1550 6389,1550 6389,1489 v1(6415,1463) ; v1(6777,1010) 7203,1436 v1(7590,1436)
IVL_B41: "NS LEFT.2" VT6.3 | length 3033
  Top Layer w10: VT6.3@7013.19,473.52 7089.8,473.52 7205.73,589.46 7462.93,589.46 7510.5,637.04 7510.5,1080.5 v1(7516,1086)
  Bottom Layer w10: 6396.46,1650 6377,1650 6377,1620 6342,1585 6342,1485 6419,1408 6419,939 6518,840 6603,840 6673,910 7176,910 7258,992 7422,992 v1(7516,1086)
IVL_B42: "NS LEFT.3" VT6.4 | length 2524
  Top Layer w10: VT6.4@7013.19,499.11 6978.89,499.11 6929,549 6929,840 6918,851 6918,1577.31 v1(7238,1897.31)
  Bottom Layer w10: 6396.46,1750 6555,1750 6634.93,1829.93 6634.93,1882.25 6649.69,1897 6859.69,1897 6860.69,1898 7237.31,1898 v1(7238,1897.31)
IVL_B43: "NS LEFT.4" VT6.5 | length 3698.1
  Top Layer w10: v1(6253,576) 6120,709 6120,2397 6160,2437 6207,2437 6227,2417 6227,1851 v1(6255,1823) ; VT6.5@7013.19,524.7 7073.3,524.7 v1(7084,514)
  Bottom Layer w10: v1(6253,576) 6701,576 6763,514 v1(7084,514) ; v1(6255,1823) 6282,1850 6396.46,1850
IVL_B44: "NS LEFT.5" VT6.6 | length 3564
  Top Layer w10: VT6.6@7013.19,550.3 7139.26,550.3 7196.97,608 7445.5,608 7484,646.5 7484,1129 v1(7502,1147)
  Bottom Layer w10: 6396.46,1950 6280,1950 6225,1895 6225,1741 6281,1685 6451,1685 6451,1207 6439,1195 6439,969 6548,860 6589,860 6658,929 7161,929 7242,1010 7365,1010 v1(7502,1147)
IVL_B45: "NS LEFT.6" VT6.7 | length 2373.2
  Top Layer w10: v1(6948,880) 6948,609 6981.11,575.89 VT6.7@7013.19,575.89
  Bottom Layer w10: 6396.46,2050 6260,2050 6207,1997 6207,1499 6396,1310 6396,858 6436.43,817.57 6616.57,817.57 6679,880 v1(6948,880)
IVL_B46: "NS LEFT.7" VT6.8 | length 2449.7
  Top Layer w10: VT6.8@7013.19,601.48 6981.52,601.48 6966,617 6966,665.7 7174.51,874.21 7174.51,1547.51 7268,1641 7268,1922 7198.49,1991.51 v1(7157,1991.51)
  Bottom Layer w10: 6396.46,2150 6579,2150 6615,2114 7034.51,2114 v1(7157,1991.51)
IVL_B47: "NS LEFT.8" VT6.9 | length 3339.9
  Top Layer w10: VT6.9@7013.19,627.07 7426.57,627.07 7465,665.5 7465,2082 7563,2180 7563,2280 v1(7517,2326)
  Bottom Layer w10: 6396.46,2250 6456,2250 6512,2306 7497,2306 v1(7517,2326)
IVL_B48: "NS LEFT.9" VT13.1 | length 3631.4
  Top Layer w10: VT13.1@9065.16,1613.19 v1(9065.16,2074)
  Bottom Layer w10: 6396.46,2350 6348,2350 6318,2320 6257,2320 6246,2309 6246,2261 6291.69,2215.31 6449.81,2215.31 6520.5,2286 7576,2286 7788,2074 v1(9065.16,2074)
IVL_B49: "NS LEFT.10" VT13.3 | length 3323.7
  Top Layer w10: v1(6571,2211) v1(6571,2390) ; VT13.3@9013.98,1613.19 v1(9014,2016)
  Bottom Layer w10: 6396.46,2450 6455.15,2446 6515,2446 v1(6571,2390) ; v1(6571,2211) 7025.24,2211 7244.61,1991.63 7362,1991.63 7386.37,2016 v1(9014,2016)
IVL_B50: "NS LEFT.11" VT13.4 | length 4402.8
  Top Layer w10: v1(6297,2577) 6312,2592 v1(6312,2710) ; v1(8830,2525) 8844,2539 9042,2539 9052,2529 9052,2425 8983,2356 8983,1979.39 8988.39,1974 VT13.4@8988.39,1613.19
  Bottom Layer w10: v1(6297,2577) 6324,2550 6396.46,2550 ; v1(6312,2710) 6288,2734 6288,2910 6298,2920 6332,2920 6338,2914 6514,2914 6632,2796 6841,2796 6935,2702 7054,2702 7271,2485 8145,2485 8171,2459 8231,2459 8297,2525 v1(8830,2525)
IVL_B51: "NS LEFT.12" VT13.5 | length 4347.8
  Top Layer w10: VT13.5@8962.8,1613.19 8962.8,2450.8 v1(9021,2509)
  Bottom Layer w10: 6396.46,2650 6306.83,2650 6270,2686.83 6270,2949 6320,2999 6525,2999 6628,2896 6886.84,2896 6924.42,2858.42 6971.58,2858.42 7026,2804 7026,2770.76 7038.76,2758 7072,2758 7305,2525 8179,2525 8198,2544 8680,2544 8697,2561 8969,2561 v1(9021,2509)
IVL_B52: "NS LEFT.13" VT13.6 | length 3527.6
  Top Layer w10: v1(8925,2468) 8937.2,2455.8 VT13.6@8937.2,1613.19
  Bottom Layer w10: 6396.46,2750 6584,2750 6634,2700 6889,2700 6906,2683 7036.33,2683 7253.33,2466 8134,2466 8159,2441 8337,2441 8364,2468 v1(8925,2468)
IVL_B53: "NS LEFT.14" VT13.7 | length 3630.7
  Top Layer w10: v1(8795,2435) 8911.61,2318.39 VT13.7@8911.61,1613.19
  Bottom Layer w10: 6396.46,2850 6356,2850 6342,2836 6342,2715 6522,2714 6633,2603 7065,2603 7220,2448 8110,2448 8136,2422 8782,2422 v1(8795,2435)
IVL_B54: "NS LEFT.15" VT13.8 | length 3997.6
  Top Layer w10: v1(6929,2820) 6974,2865 v1(6974,2917) ; v1(8668,2575) 8668,1640 8742,1566 8872.02,1566 8886.02,1580 VT13.8@8886.02,1613.19
  Bottom Layer w10: 6396.46,2950 6514.49,2950 6649.49,2815 6924,2815 v1(6929,2820) ; v1(6974,2917) 7311,2580 7655,2580 7715,2640 8738,2640 8748,2630 8748,2590 8737,2579 8672,2579 v1(8668,2575)
IVL_B55: "NS LEFT.16" VT13.9 | length 3603.2
  Top Layer w10: v1(8718,2610) 8718,2442 8860.43,2299.57 VT13.9@8860.43,1613.19
  Bottom Layer w10: 6396.46,3050 6511,3050 6647,2914 6896.34,2914 6929.05,2881.28 6976.72,2881.28 7300.6,2557.4 7776.4,2557.4 7829,2610 v1(8718,2610)
IVL_B56: "NS LEFT.17" VT14.1 | length 3274.2
  Top Layer w10: v1(6967,3024) 6967,3004 6849,2886 6849,2836.17 6898.17,2787 v1(6978,2787) ; v1(8201,2489) 8265.16,2424.84 VT14.1@8265.16,1613.19
  Bottom Layer w10: 6396.46,3150 6503,3150 6649,3004 6947,3004 v1(6967,3024) ; v1(6978,2787) 7025.18,2739.82 7045.18,2739.82 7282,2503 8187,2503 v1(8201,2489)
IVL_B57: "NS LEFT.18" VT14.3 | length 4313.4
  Top Layer w10: v1(6746,3709) 6746,3570 6756,3560 6777.38,3560 6954,3383.38 v1(6954,3340) ; v1(7585,2952) 7585,2547.11 7789,2343.11 7789,1842 v1(7986,1645) ; VT14.3@8213.98,1613.19 8213.98,1578.02 8251,1541 v1(8264,1541)
  Bottom Layer w10: 6396.46,3250 6440,3250 6452,3262 6452,3903 6489,3940 6515,3940 v1(6746,3709) ; v1(6954,3340) 7258,3036 7380,3036 7390,3026 7390,2964 7421.93,2932.07 7565.07,2932.07 v1(7585,2952) ; v1(7986,1645) 8160,1645 v1(8264,1541)
IVL_B58: "NS LEFT.19" VT14.4 | length 3948.1
  Top Layer w10: v1(6563,2505) 6683,2385 6683,1760 6729,1714 6846,1714 6846,1786 v1(6864,1804) ; VT14.4@8188.39,1613.19 v1(8188.39,1858)
  Bottom Layer w10: 6396.46,3350 6339,3350 6233,3244 6233,2598 6326,2505 v1(6563,2505) ; v1(6864,1804) 6864,1876 6868,1880 6922,1880 6944,1858 v1(8188.39,1858)
IVL_B59: "NS LEFT.20" VT14.5 | length 6904.1
  Top Layer w10: v1(6262,3369) 6101,3208 6101,109 6161,49 7099,49 7340,290 7340,491 7399,550 7604,550 7785,731 7785,980 v1(8002,1197) ; VT14.5@8162.8,1613.19 8162.8,1558.2 v1(8234,1487)
  Bottom Layer w10: v1(6262,3369) 6343,3450 6396.46,3450 ; v1(8002,1197) 8002,1519 8028,1545 8176,1545 v1(8234,1487)
IVL_B60: "NS LEFT.21" VT14.6 | length 2923.6
  Top Layer w10: v1(7451,3355) 7640,3355 7669,3326 7669,3123 7705,3087 7705,2868.92 7719,2854.92 7719,2632 8137.2,2213.8 VT14.6@8137.2,1613.19
  Bottom Layer w10: 6703.54,3450 6944,3450 6969,3425 7381,3425 v1(7451,3355)
IVL_B61: "NS LEFT.22" VT14.7 | length 2879.9
  Top Layer w10: v1(7369.48,3324) 7606,3324 7649,3281 7649,3034 7679,3004 7679,2862.82 7695.04,2846.77 7695.04,2624.97 8111.61,2208.4 VT14.7@8111.61,1613.19
  Bottom Layer w10: 6703.54,3350 6777,3350 6833,3406 7287.48,3406 v1(7369.48,3324)
IVL_B62: "NS LEFT.23" VT14.8 | length 2530.1
  Top Layer w10: v1(7660,2806) 7675,2791 7675,2596.79 8086.02,2185.76 VT14.8@8086.02,1613.19
  Bottom Layer w10: 6703.54,3250 7011,3250 7280.52,2980.48 7315.39,2980.48 7335.87,2960 7335.87,2925.13 7406,2855 7611,2855 v1(7660,2806)
IVL_B63: "NS LEFT.24" VT14.9 | length 2404.2
  Top Layer w10: v1(7644.09,2690.91) 7644.09,2591.7 8060.43,2175.35 VT14.9@8060.43,1613.19
  Bottom Layer w10: 6703.54,3150 7018.86,3150 7110.99,3057.86 7110.99,3018.06 7438.14,2690.91 v1(7644.09,2690.91)
IVL_B64: "NS LEFT.25" VT8.1 | length 1090.7
  Top Layer w10: VT8.1@6404.84,3986.81 6404.84,3952.16 6504,3853 v1(6504,3813)
  Bottom Layer w10: v1(6504,3813) 6622,3695 6622,3080 6652,3050 6703.54,3050
IVL_B65: "NS LEFT.26" VT8.3 | length 1604.9
  Top Layer w10: VT8.3@6456.02,3986.81 6456.02,3944 v1(6496.02,3904)
  Bottom Layer w10: v1(6496.02,3904) 6471,3878.98 6471,3634 6599,3506 6599,3239 6545,3185 6342,3185 6341,3184 6341,3121 6366,3096 6514,3096 6660,2950 6703.54,2950
IVL_B66: "NS LEFT.27" VT8.4 | length 2244.2
  Top Layer w10: v1(6477,4059) 6481.61,4054.39 VT8.4@6481.61,3986.81 ; v1(6746,3772) 6716,3742 6716,2939 6740,2915 6845.42,2915 6852,2921.58 6852,2958 6948,3054 7003,3054 7009,3048 7009,3020 6880,2891 v1(6880,2850)
  Bottom Layer w10: v1(6477,4059) 6515,4097 6580,4097 6601,4076 6601,3917 v1(6746,3772) ; 6703.54,2850 v1(6880,2850)
IVL_B67: "NS LEFT.28" VT8.5 | length 2024.5
  Top Layer w10: v1(6272.96,4057) 6272.96,3780.27 6310,3743.23 6310,2898 v1(6318,2890) ; v1(6501,4123.8) 6507.2,4117.59 VT8.5@6507.2,3986.81
  Bottom Layer w10: v1(6272.96,4057) 6339.75,4123.8 v1(6501,4123.8) ; v1(6318,2890) 6495,2890 6635,2750 6703.54,2750
IVL_B68: "NS LEFT.29" VT8.6 | length 2116.7
  Top Layer w10: VT8.6@6532.8,3986.81 6532.8,3877.2 v1(6576,3834) ; v1(6980,2650) 7100,2770 v1(7100,2899.88)
  Bottom Layer w10: v1(6576,3834) 6648,3762 6648,3109.31 6660,3097.31 7033.49,3097.31 7090.94,3039.86 7090.94,2908.94 v1(7100,2899.88) ; 6703.54,2650 v1(6980,2650)
IVL_B69: "NS LEFT.30" VT8.7 | length 2318.9
  Top Layer w10: VT8.7@6558.39,3986.81 6558.39,4050.39 v1(6571,4063)
  Bottom Layer w10: v1(6571,4063) 6434,3926 6434,3866 6211,3643 6211,2555.26 6280.26,2486 6450,2486 6472,2464 6615,2464 6676,2525 6676,2550 6703.54,2550
IVL_B70: "NS LEFT.31" VT8.8 | length 2294.7
  Top Layer w10: v1(6569,3338) 6606,3375 6606,3850 6583.98,3872.02 VT8.8@6583.98,3986.81
  Bottom Layer w10: v1(6569,3338) 6435,3204 6325,3204 6251,3130 6251,2616 6260,2607 6362.53,2607 6384.84,2584.69 6758,2584.69 6758,2460 6748,2450 6703.54,2450
IVL_B71: "NS LEFT.32" VT8.9 | length 2660.2
  Top Layer w10: v1(6277,2290) 6298,2311 6298,2516.37 6266,2548.37 6266,2730.43 6342.57,2807 6536,2807 6549,2820 6549,2880 6529,2900 6440,2900 6400,2940 6400,3065 6440,3105 6520,3105 6624,3209 6624,3882 6609.57,3896.43 VT8.9@6609.57,3986.81
  Bottom Layer w10: v1(6277,2290) 6449,2290 6483,2324 6637.95,2324 6663.95,2350 6703.54,2350
IVL_B72: "NS LEFT.33" VT7.1 | length 1858.8
  Top Layer w10: v1(6366,1055) 6384.84,1036.16 VT7.1@6384.84,986.81
  Bottom Layer w10: v1(6366,1055) 6290,1055 6148,1197 6148,2075 6270,2197 6468.69,2197 6521.69,2250 6703.54,2250
IVL_B73: "NS LEFT.34" VT7.3 | length 2886.4
  Top Layer w10: v1(6323.79,1094) 6380,1094 6436.02,1037.98 VT7.3@6436.02,986.81
  Bottom Layer w10: v1(6323.79,1094) 6166,1251.79 6166,2036 6240,2110 6507.5,2110 6528.5,2089 6999.51,2089 7127.51,1961 7169.49,1961 7187,1978.51 7187,2008.09 7045.09,2150 6703.54,2150
IVL_B74: "NS LEFT.35" VT7.4 | length 1753.6
  Top Layer w10: v1(6197,1463) 6197,1247 6319,1125 6409.12,1125 6461.61,1072.51 VT7.4@6461.61,986.81
  Bottom Layer w10: v1(6197,1463) 6188,1472 6188,2014 6260,2086 6450,2086 6486,2050 6703.54,2050
IVL_B75: "NS LEFT.36" VT7.5 | length 1756.9
  Top Layer w10: v1(6257,1760) 6167,1670 6167,1063.7 6345.7,885 6422.2,885 6487.2,950 VT7.5@6487.2,986.81
  Bottom Layer w10: v1(6257,1760) 6311,1814 6552.54,1814 6593.46,1854.92 6593.46,1923.46 6620,1950 6703.54,1950
IVL_B76: "NS LEFT.37" VT7.6 | length 1001.3
  Top Layer w10: v1(6470,1142) 6512.8,1099.2 VT7.6@6512.8,986.81
  Bottom Layer w10: v1(6470,1142) 6469,1143 6469,1534.92 6607.4,1673.31 6607.4,1737.4 6659.55,1789.55 6659.55,1844.95 6664.59,1850 6703.54,1850
IVL_B77: "NS LEFT.38" VT7.7 | length 1090.5
  Top Layer w10: VT7.7@6538.39,986.81 6538.39,920 v1(6567.39,891)
  Bottom Layer w10: v1(6567.39,891) 6500,958.39 6500,1537 6684,1721 6684,1750 6703.54,1750
IVL_B78: "NS LEFT.39" VT7.8 | length 894
  Top Layer w10: v1(6544,1082) 6563.98,1062.02 VT7.8@6563.98,986.81
  Bottom Layer w10: v1(6544,1082) 6551,1089 6677,1089 6769,1181 6759,1650 6703.54,1650
IVL_B79: "NS LEFT.40" VT7.9 | length 633.6
  Top Layer w10: VT7.9@6589.57,986.81 6589.57,1075 v1(6640,1125.43)
  Bottom Layer w10: v1(6640,1125.43) 6640,1526 6664,1550 6703.54,1550
IVL_B80: "NS BOTTOM.1" VT15.1 | length 1589.9
  Top Layer w10: v1(7412,737) 7421,746 7421,2184.84 VT15.1@7443.19,2184.84
  Bottom Layer w10: v1(7412,737) 7421,728 7500,728 7500,703.54
IVL_B81: "NS BOTTOM.2" VT15.3 | length 1973.1
  Top Layer w10: v1(7330,731) 7330,894 7348,912 7348,956 7332,972 v1(7332,2022) ; v1(7372,2224) 7384.02,2236.02 VT15.3@7443.19,2236.02
  Bottom Layer w10: v1(7330,731) 7330,711 7444.31,701 7465.31,680 7465.31,649.17 7581.17,649.17 7600,668 7600,703.54 ; v1(7332,2022) 7372,2062 v1(7372,2224)
IVL_B82: "NS BOTTOM.3" VT15.4 | length 2348.6
  Top Layer w10: v1(7263.86,790) 7263.86,744.85 7310,698.71 7344.83,698.71 7366.11,720 7366.11,746.11 7393,773 7393,2142.91 7342,2193.91 7342,2240 7363.61,2261.61 VT15.4@7443.19,2261.61
  Bottom Layer w10: v1(7263.86,790) 7680,790 7700,770 7700,703.54
IVL_B83: "NS BOTTOM.4" VT15.5 | length 2119.4
  Top Layer w10: v1(7362,823) 7367,828 7367,2132.6 7323.69,2175.91 7323.69,2248.9 7362,2287.2 VT15.5@7443.19,2287.2
  Bottom Layer w10: v1(7362,823) 7373,812 7778,812 7800,790 7800,703.54
IVL_B84: "NS BOTTOM.5" VT15.6 | length 2303.5
  Top Layer w10: v1(7424.5,670.5) 7445,691 7445,2090 7545,2190 7545,2220.19 7491,2274.19 7491,2310.8 VT15.6@7443.19,2312.8
  Bottom Layer w10: v1(7424.5,670.5) 7424.5,653.99 7447.49,631 7819.83,631 7872.83,684 7900,684 7900,703.54
IVL_B85: "NS BOTTOM.6" VT15.7 | length 2324.8
  Top Layer w10: v1(7318,926) 7308,936 7308,1948 7298,1958 7298,2064.37 7305.69,2072.06 7305.69,2262.69 7381.39,2338.39 VT15.7@7443.19,2338.39
  Bottom Layer w10: v1(7318,926) 7411,833 7928,833 8000,761 8000,703.54
IVL_B86: "NS BOTTOM.7" VT15.8 | length 2973.6
  Top Layer w10: v1(7352,2361) 7354.98,2363.98 VT15.8@7443.19,2363.98 ; v1(8371,895) v1(8371,2108)
  Bottom Layer w10: v1(7352,2361) 7548.5,2361 7801.5,2108 v1(8371,2108) ; 8100,703.54 8100,659.17 8110.17,649 8334.83,649 8336,650.17 8336,860 v1(8371,895)
IVL_B87: "NS BOTTOM.8" VT15.9 | length 2407.3
  Top Layer w10: VT15.9@7443.19,2389.57 7516.93,2389.57 7582,2324.5 7582,2140 7540,2098 7540,1122 7546,1116 v1(7546,916)
  Bottom Layer w10: v1(7546,916) 7597,865 8160,865 8200,825 8200,703.54
IVL_B88: "NS BOTTOM.9" VT16.1 | length 3556.6
  Top Layer w10: v1(7280,883) 7287,890 7287,1941 7279,1949 7279,2134 7287,2142 7287,2357 7426,2496 7426,2886.84 7405,2907.84 7405,3059.84 VT16.1@7443.19,3059.84
  Bottom Layer w10: v1(7280,883) 7287,890 7287,943 7300,956 7708,956 7779,885 8255,885 8300,840 8300,703.54
IVL_B89: "NS BOTTOM.10" VT16.3 | length 3166
  Top Layer w10: VT16.3@7443.19,3111.02 7521.98,3111.02 7544,3089 7544,3007.07 7537,3000.07 7537,2513.95 7726,2324.95 7726,1574.73 7788.73,1512 8005,1512 v1(8033,1484)
  Bottom Layer w10: v1(8033,1484) 8033,997 8124,906 8290,906 8309,925 8390,925 8401,914 8401,806 8400,805 8400,703.54
IVL_B90: "NS BOTTOM.11" VT16.4 | length 3453.7
  Top Layer w10: v1(7371,3136.61) VT16.4@7443.19,3136.61 ; v1(7737,2948) 7737,2654.7 7770,2621.7 8164.3,2621.7 8294,2492 8294,958 v1(8281,945)
  Bottom Layer w10: v1(7371,3136.61) 7499.61,3008 7530,3008 7563,3041 7644,3041 v1(7737,2948) ; v1(8281,945) 8465,945 8500,910 8500,703.54
IVL_B91: "NS BOTTOM.12" VT16.5 | length 3579.3
  Top Layer w10: v1(7396,2803) 7386,2813 7386,3007 7341,3052 7341,3160 7351,3170 7390.2,3170 7398,3162.2 VT16.5@7443.19,3162.2 ; v1(7507,2737) 7507,2469 7648,2328 7648,1551 7745,1454 8137,1454 v1(8174,1491)
  Bottom Layer w10: v1(7396,2803) 7462,2737 v1(7507,2737) ; v1(8174,1491) 8145,1520 8095,1520 8084,1509 8084,1421 8600,905 8600,703.54
IVL_B92: "NS BOTTOM.13" VT16.6 | length 3173.6
  Top Layer w10: VT16.6@7443.19,3187.8 7480,3187.8 7563,3104.8 7563,2990.07 7555,2982.07 7555,2529.55 7754,2330.55 7754,1611 7834,1531 8074,1531 v1(8115,1490)
  Bottom Layer w10: v1(8115,1490) 8700,905 8700,703.54
IVL_B93: "NS BOTTOM.14" VT16.7 | length 4378.8
  Top Layer w10: VT16.7@7443.19,3213.39 v1(7515,3213.39) ; v1(9140,2610) 9220,2610 9240,2590 9240,2146 9301,2085 9301,1339 v1(9333,1307)
  Bottom Layer w10: v1(7515,3213.39) 7545.39,3183 7651,3183 7809,3025 8989,3025 9140,2874 v1(9140,2610) ; 8800,703.54 8800,813.88 9293.12,1307 v1(9333,1307)